# Altium PCB NBP6 Altera Stratix BGA780 Rev1.00.PcbDoc (part 2 of 3)
Units mm, origin at the board's own origin, x right, y up, seen from the top; angles counter-clockwise.
Board outline 69 x 80.99 mm, 6 copper layers (Top Layer, Upper, lower, VCC_PLANE, GND_PLANE, Bottom Layer); 92 components, 279 nets, 1271 pads, 560 vias.
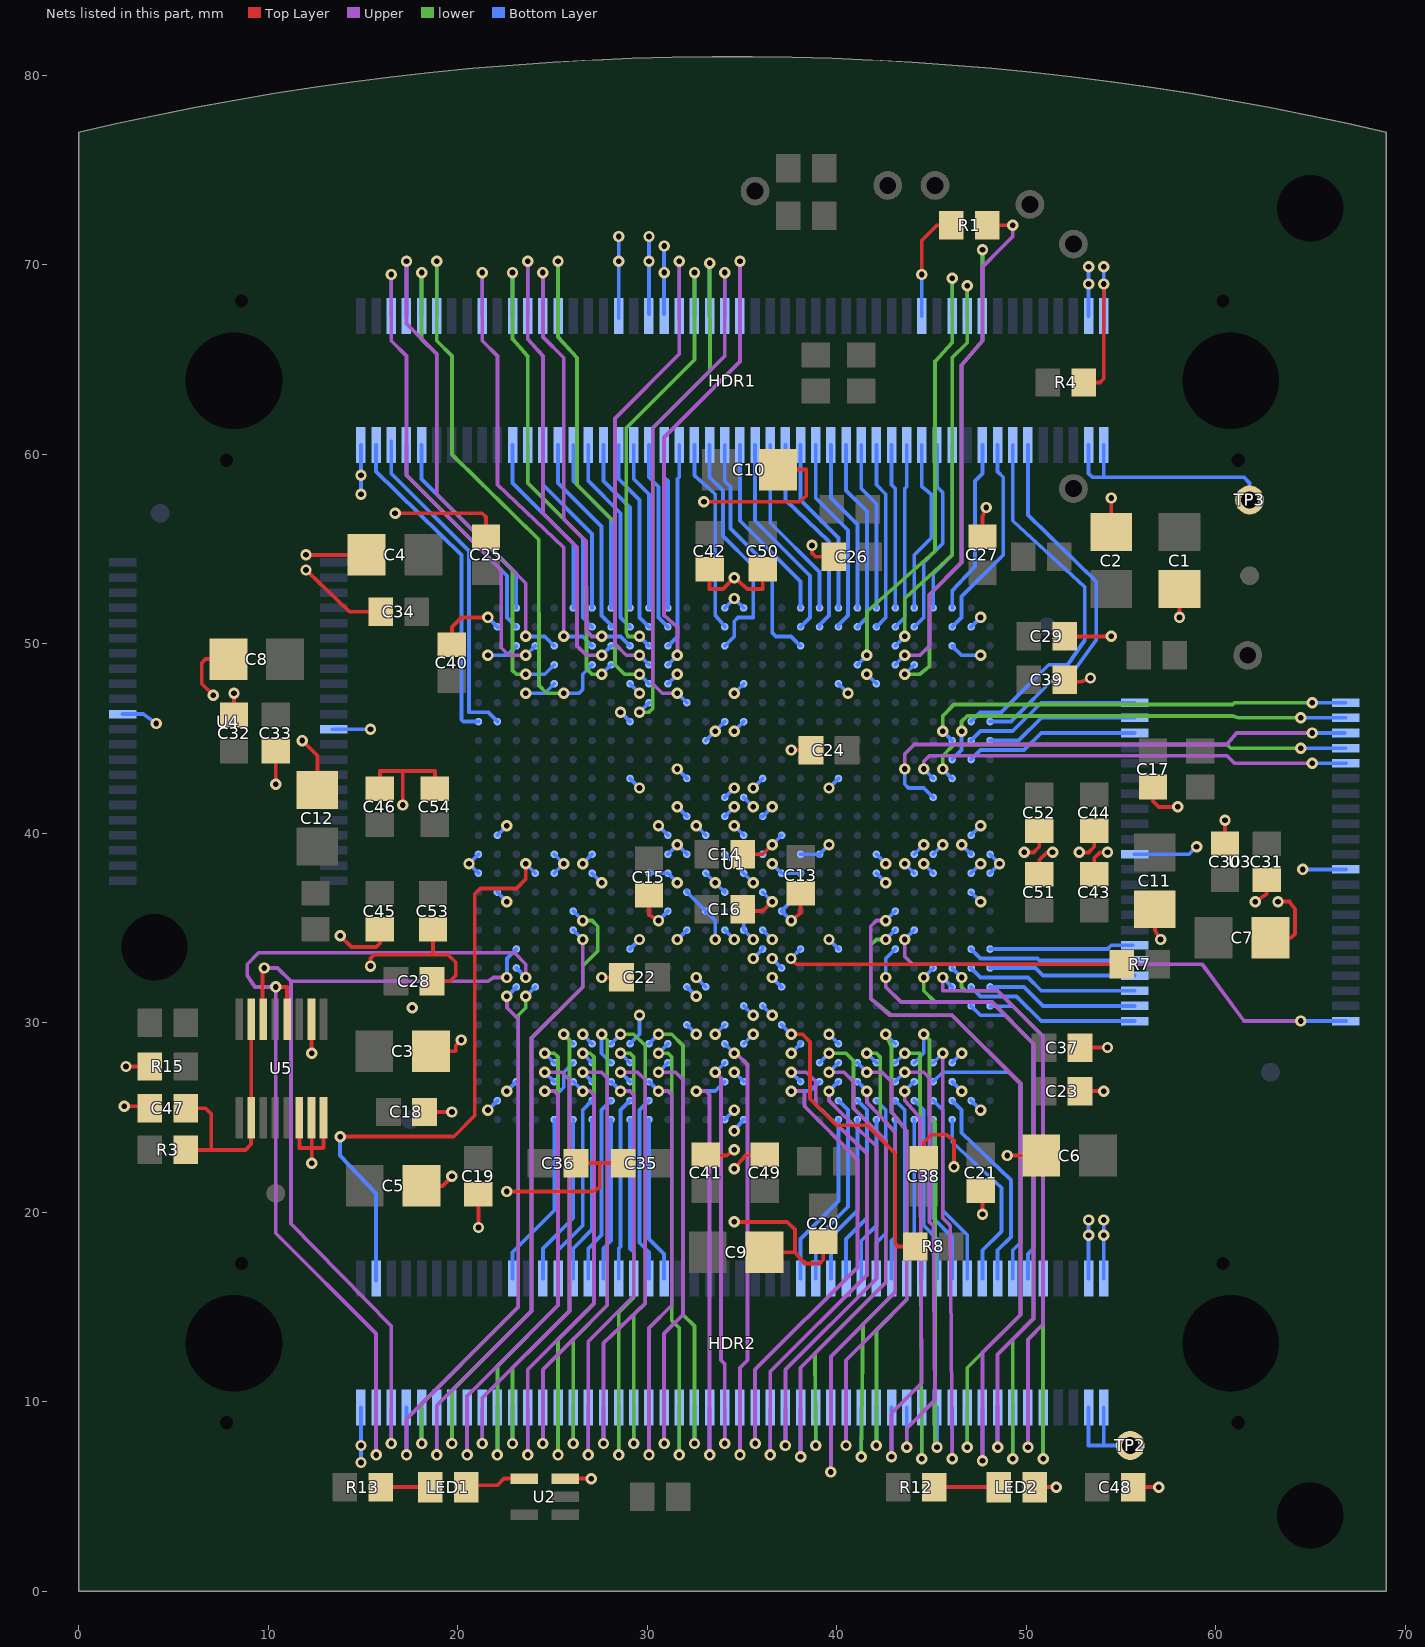
[diagram p6: the nets of this part, all layers, seen from the top]

## Via types
v1: diameter 0.6, hole 0.3, Top Layer to Bottom Layer, 560 vias

## Nets (pads, with @x,y where several pads share a name; then routed paths per layer and width w, separated by ;. In a path a pad name is that pad's centre, name@x,y a point inside that pad or via, vN(x,y) a via of type N, cw(c..) or ccw(c..) an arc to the next point about the centre after c; other vN are vias at no path point) (continued)
GND: C1.2 C2.2 C3.2 C4.2 C5.2 C6.2 C7.2 C8.2 C9.2 C10.2 C11.2 C12.2 C13.2 C14.2 C15.2 C16.2 C17.2 C18.2 C19.2 C20.2 C21.2 C22.2 C23.2 C24.2 C25.2 C26.2 C27.2 C28.2 C29.2 C30.2 C31.2 C32.2 C33.2 C34.2 C35.2 C36.2 C37.2 C38.2 C39.2 C40.2 C41.2 C42.2 C43.2 C44.2 C45.2 C46.2 C47.2 C48.2 C49.2 C50.2 C51.2 C52.2 C53.2 C54.2 HDR1.1 HDR1.36 HDR1.40 HDR1.42 HDR1.98 HDR1.100 HDR2.1 HDR2.98 HDR2.100 LED2.2 R4.2 R15.1 U1.A14 U1.A15 U1.AA12 U1.AA16 U1.AA17 U1.AB13 U1.AB14 U1.AC15 U1.AC17 U1.AD9 U1.AD11 U1.AD14 U1.AD20 U1.AD22 U1.AE3 U1.AF3 U1.AF14 U1.AF26 U1.AG2 U1.AG27 U1.AH14 U1.AH15 U1.B2 U1.B27 U1.C3 U1.C26 U1.E7 U1.E9 U1.E14 U1.E18 U1.E20 U1.E24 U1.G14 U1.G15 U1.G20 U1.H16 U1.K9 U1.K13 U1.K17 U1.K20 U1.L14 U1.L15 U1.M13 U1.M15 U1.M17 U1.N2 U1.N12 U1.N14 U1.N16 U1.N18 U1.N27 U1.P1 U1.P2 U1.P4 U1.P5 U1.P7 U1.P10 U1.P11 U1.P13 U1.P15 U1.P17 U1.P18 U1.P22 U1.P24 U1.P28 U1.R1 U1.R2 U1.R4 U1.R5 U1.R7 U1.R11 U1.R12 U1.R14 U1.R16 U1.R18 U1.R19 U1.R22 U1.R24 U1.R28 U1.T2 U1.T11 U1.T13 U1.T15 U1.T17 U1.T27 U1.U12 U1.U14 U1.U16 U1.U18 U1.V13 U1.V14 U1.V15 U1.V17 U1.W9 U1.W13 U1.W20 U1.Y12 U2.3 U3.12 U3.34 U4.12 U4.34 U5.6 U5.7 U5.8 U5.10 | length 273.2
  Top Layer w0.2: v1(2.4,25.6) C47.2@3.7,25.6 ; v1(2.5,27.7) R15.1@3.75,27.7 ; v1(7.1,47.3) 6.5,47.9 6.5,49 6.7,49.2 C8.2@7.9,49.2 ; C32.2@8.2,46.25 8.2,47.1 v1(8.2,47.4) ; v1@10.4,42.8 C33.2@10.4,44.4 ; U5.6@11.652,25 11.652,23.4 12.9,23.4 12.922,23.422 U5.8@12.922,25 ; v1(11.8,44.9) 12.6,44.1 C12.2@12.6,42.4 ; v1(12,54.7) C4.2@15.2,54.7 ; v1@12.2,53.9 v1(12,53.9) 14.3,51.7 C34.2@15.95,51.7 ; v1(12.3,22.6) U5.7@12.3,25 ; v1(12.3,28.4) 12.287,28.413 U5.10@12.287,30.2 U5.10@12.3,30.213 ; v1(13.8,34.6) 14.4,34 15.7,34 15.9,34.2 C45.2@15.9,35 ; v1@15.4,32.9 15.4,33.4 15.6,33.6 19.5,33.6 19.9,33.2 19.9,32.5 19.6,32.2 C28.2@18.65,32.2 ; C34.2@15.4,51.1 C34.2@16.35,51.1 ; C46.2@15.9,42.35 15.9,43.3 18.8,43.3 C54.2@18.8,42.35 ; v1(16.7,56.9) 21.3,56.9 21.5,56.7 ; v1(17.1,41.5) 17.1,43.3 ; C5.2@18.1,21.4 19.2,21.4 v1(19.7,21.9) ; C18.2@18.2,25.3 v1(19.7,25.3) ; C3.2@18.6,28.5 19.9,28.5 19.9,28.8 v1(20.2,29.1) ; 18.7,33.6 C53.2@18.7,34.95 C53.2@18.7,34.9 ; C40.2@19.7,49.95 19.7,50.9 20.2,51.4 v1(21.6,51.4) ; v1(21.1,19.2) 21.1,20.9 C19.2@21.1,20.95 ; C25.2@21.5,55.85 21.5,56.7 ; 21.5,56.5 21.5,56.7 ; v1(22.6,21.1) 27.1,21.1 27.5,21.3 27.5,22.6 ; U2.3@25.675,5.95 v1(27.05,5.95) ; C36.2@26.25,22.6 27.5,22.6 ; 27.1,22.6 27.5,22.6 ; v1(27.6,32.4) C22.2@28.65,32.4 ; C35.2@28.75,22.6 27.5,22.6 ; C15.2@30.1,36.75 30.1,35.7 v1(30.6,35.4) ; v1(33,57.5) 38,57.5 38.4,57.8 38.4,59.2 C10.2@36.9,59.2 ; C41.2@33.1,23 34.2,23 v1(34.6,23.3) v1@34.6,23.4 ; C42.2@33.3,53.95 33.3,52.9 34,52.9 v1(34.6,53.5) ; v1@34.6,19.6 v1(34.6,19.5) 37.4,19.5 37.8,19.1 37.8,17.9 ; v1(34.6,22.3) 35.2,23 C49.2@36.2,23 ; v1@34.7,53.5 v1(34.6,53.5) ; C16.2@35.05,35.9 36.1,35.9 v1(36.6,36.4) ; C14.2@35.05,38.9 36.1,38.9 v1(36.6,39.4) ; C50.2@36.1,53.95 36.1,52.9 35.3,52.9 v1(34.6,53.5) ; C9.2@36.2,17.9 37.8,17.9 ; v1(37.6,35.4) 38.1,35.8 C13.2@38.1,36.85 ; v1(37.6,44.4) C24.2@38.7,44.4 ; v1(38.7,55.2) 38.7,54.8 38.9,54.6 C26.2@39.85,54.6 ; C20.2@39.3,18.45 39.3,17.5 39.1,17.3 38.3,17.3 37.8,17.9 ; C38.2@44.6,22.85 44.6,23.7 45,24.1 45.8,24.1 46.2,23.8 v1(46.2,22.4) ; v1(47.7,19.9) C21.2@47.7,21 ; C27.2@47.7,55.6 47.7,56.7 v1(47.9,57.2) ; v1(49,23) C6.2@50.7,23 ; v1(49.9,39) 50.4,39 50.7,39.3 C52.2@50.7,40.15 ; LED2.2@50.45,5.5 v1(51.6,5.5) ; C51.2@50.7,37.85 50.7,38.6 51.1,39 v1(51.4,39) ; C39.2@52,48 52.9,48 v1(53.4,48.2) ; C29.2@52.05,50.4 v1@54.2,50.4 ; C37.2@52.4,28.7 v1(54.3,28.7) ; v1(52.8,39) 53.3,39 53.6,39.3 C44.2@53.6,40.2 ; C23.2@52.85,26.4 v1(54.1,26.4) ; R4.2@53.05,63.8 53.9,63.8 54.1,64 v1(54.1,69) ; C43.2@53.6,37.85 53.6,38.7 53.9,39 v1(54.3,39) ; C2.2@54.5,55.9 v1(54.5,57.7) ; C48.2@55.6,5.5 v1(57,5.5) ; C17.2@56.7,42.4 56.7,41.7 57,41.4 v1(58,41.4) ; C11.2@56.8,36 56.8,34.9 v1(57.1,34.4) ; v1(58.1,51.4) C1.2@58.1,52.9 ; C30.2@60.5,39.4 v1(60.5,40.7) ; v1(62.1,36.4) 62.7,36.8 C31.2@62.7,37.55 ; C7.2@62.9,34.5 64,34.5 64.2,34.7 64.2,36 63.9,36.4 v1(63.3,36.4)
  Upper w0.2: v1(27.05,5.95) v1@27.1,6
  Bottom Layer w0.2: U4.34@2.3,46.3 3.4,46.3 v1(4.1,45.8) ; U4.12@13.4,45.5 v1(15.4,45.5) ; v1(14.9,6.8) v1(14.9,7.7) HDR2.1@14.9,9.7 ; v1(14.9,57.9) HDR1.1@14.9,60.5 ; U1.R28@21.1,37.9 v1(20.6,38.4) U1.P28@21.1,38.9 ; v1(21.6,25.4) U1.AG27@22.1,25.9 ; v1(21.6,49.4) 22.6,49.4 U1.C26@23.1,49.9 ; v1(21.6,51.4) U1.B27@22.1,50.9 ; U1.T27@22.1,36.9 v1(22.6,36.4) ; U1.N27@22.1,39.9 v1(22.6,40.4) ; v1(22.6,26.4) U1.AF26@23.1,26.9 ; v1(23.6,47.4) 24.6,47.4 U1.E24@25.1,47.9 ; U1.R24@25.1,37.9 v1(25.6,38.4) U1.P24@25.1,38.9 ; v1(26.6,29.4) U1.AD22@27.1,28.9 ; v1(26.6,38.4) U1.P22@27.1,38.9 ; U1.R22@27.1,37.9 v1(27.6,37.4) ; HDR1.36@28.5,67.2 v1(28.5,71.5) ; v1(28.6,46.4) U1.G20@29.1,45.9 ; U1.AD20@29.1,28.9 29.6,29.4 v1(29.6,30.4) ; U1.W20@29.1,33.9 v1(29.6,34.4) ; U1.K20@29.1,42.9 v1(29.6,42.4) ; U1.E20@29.1,47.9 v1(29.6,47.4) ; U1.R19@30.1,37.9 U1.R18@31.1,37.9 v1(31.6,37.4) ; HDR1.40@30.1,67.4 v1(30.1,71.5) ; v1(30.6,35.4) U1.U18@31.1,35.9 ; v1(30.6,40.4) U1.N18@31.1,39.9 ; HDR1.42@30.9,67.4 v1(30.9,71) ; U1.P18@31.1,38.9 v1(31.6,39.4) U1.P17@32.1,38.9 ; U1.E18@31.1,47.9 v1(31.6,48.4) ; v1(31.6,34.4) U1.V17@32.1,34.9 ; v1(31.6,41.4) U1.M17@32.1,40.9 ; v1(31.6,43.4) U1.K17@32.1,42.9 ; U1.AC17@32.1,29.9 v1(32.6,29.4) ; U1.AA17@32.1,31.9 v1(32.6,31.4) ; U1.T17@32.1,37 U1.T17@32.1,36.9 U1.U16@33.1,35.9 ; v1(32.6,32.4) U1.AA16@33.1,31.9 ; v1(32.6,40.4) U1.N16@33.1,39.9 ; U1.U16@33.1,35.8 U1.U16@33.1,35.9 ; U1.R16@33.1,37.9 v1(33.6,37.4) U1.T15@34.1,36.9 U1.T15@34.1,37 ; U1.H16@33.1,44.9 v1(33.6,45.4) U1.G15@34.1,45.9 ; v1(33.6,29.4) U1.AC15@34.1,29.9 ; v1(33.6,34.4) 33.6,35.3 33.6,35.4 U1.U16@33.1,35.9 ; U1.AH15@34.1,24.9 v1(34.6,25.4) ; U1.V15@34.1,34.9 v1(34.6,34.4) ; U1.P15@34.1,38.9 U1.R14@35.1,37.9 v1@35.5,37.5 ; U1.M15@34.1,40.9 v1(34.6,41.4) ; U1.L15@34.1,41.9 v1(34.6,42.4) ; U1.A15@34.1,51.9 v1(34.6,52.4) U1.A14@35.1,51.9 ; v1(34.6,24.3) U1.AH14@35.1,24.9 ; v1(34.6,27.4) U1.AF14@35.1,26.9 ; v1(34.6,40.4) U1.N14@35.1,39.9 ; v1(34.6,45.4) U1.G14@35.1,45.9 ; v1(34.6,47.4) U1.E14@35.1,47.9 ; U1.AD14@35.1,28.9 v1(35.6,29.4) ; U1.AB14@35.1,30.9 v1(35.6,30.4) ; U1.U14@35.1,35.9 U1.V14@35.1,34.9 v1(35.6,34.4) ; U1.L14@35.1,41.9 v1(35.6,41.4) ; v1(35.6,33.4) U1.W13@36.1,33.9 ; v1(35.6,42.4) U1.K13@36.1,42.9 ; U1.M13@36,40.9 U1.M13@36.1,40.9 v1(36.6,41.4) ; U1.AB13@36.1,30.9 v1(36.6,30.4) ; U1.V13@36.1,34.9 v1(36.6,34.4) ; U1.T13@36.1,36.9 v1(36.6,36.4) ; U1.P13@36.1,38.9 v1(36.6,39.4) ; v1(36.6,32.4) U1.AA12@37.1,31.9 ; v1(36.6,33.4) U1.Y12@37.1,32.9 ; v1(36.6,38.4) U1.R12@37.1,37.9 ; v1@36.6,39.5 v1(36.6,39.4) ; U1.N12@37,39.8 v1(36.6,39.4) ; U1.R12@37.2,37.9 U1.R12@37.1,37.9 ; v1(37.6,28.4) U1.AD11@38.1,28.9 ; v1(37.6,35.4) U1.U12@37.1,35.9 U1.T11@38.1,36.9 ; U1.AD11@38,28.9 U1.AD11@38.1,29 ; U1.R11@38,37.9 U1.R11@38.1,37.9 ; U1.P11@38.1,38.9 U1.P10@39.1,38.9 ; U1.R11@38.2,37.9 U1.R11@38.1,37.9 ; U1.P10@39.1,38.8 U1.P10@39.1,38.9 ; v1(39.6,29.4) U1.AD9@40.1,28.9 ; v1(39.6,34.4) U1.W9@40.1,33.9 ; v1(39.6,39.4) U1.P10@39.1,38.9 ; v1(39.6,42.4) U1.K9@40.1,42.9 ; U1.E9@40.1,47.9 v1(40.6,47.4) ; v1(41.6,48.4) U1.E7@42.1,47.9 ; U1.R7@42.1,37.9 v1(42.6,37.4) ; U1.P7@42.1,38.9 v1(42.6,38.4) ; v1(43.6,38.4) U1.R5@44.1,37.9 ; U1.P5@44.1,38.9 v1(44.6,39.4) ; v1(44.6,38.4) U1.R4@45.1,37.9 ; U1.P4@45.1,38.9 v1(45.6,39.4) ; U1.AF3@46.1,26.9 v1(46.6,26.4) ; U1.AE3@46.1,27.9 v1(46.6,28.4) ; U1.C3@46.2,49.9 U1.C3@46.1,49.9 46.6,49.4 v1(47.6,49.4) ; v1(46.6,39.4) U1.P2@47.1,38.9 U1.P2@47.1,39 ; U1.AG2@47.1,25.9 v1(47.6,25.4) ; U1.T2@47.1,36.9 v1(47.6,36.4) ; U1.R2@47.1,37.9 v1(47.6,38.4) ; U1.N2@47.1,39.9 v1(47.6,40.4) ; U1.B2@47.1,50.9 v1(47.6,51.4) ; U1.R1@48.1,37.9 v1(48.6,38.4) U1.P1@48.1,38.9 ; HDR2.98@53.3,16.5 v1(53.3,19.6) ; HDR1.98@53.3,67.3 v1(53.3,69.9) ; HDR2.100@54.1,16.5 v1(54.1,19.6) ; HDR1.100@54.1,67.4 v1(54.1,69.9) ; U3.34@55.725,38.9 58.6,38.9 v1(59,39.3) ; v1(64.6,38.1) U3.12@66.9,38.1 ; U1.W13@36.1,33.9 36.1,34 U1.W13@36.1,33.9 ; U1.R12@37.1,37.9 U1.R11@38.1,37.9 ; U1.N12@37,39.9 U1.N12@37.1,39.9 U1.N12@37,39.9
  other v1: 53.3,18.8 54.1,18.8 17.6,30.8 15.4,33 35.6,37.4 10.4,42.6 54.5,50.4 14.9,58.9 53.3,69 30.9,69.6 28.5,70.2 30.1,70.2
GREEN0: HDR1.10 U1.D24 | length 27.7
  lower w0.2: v1(18.1,69.6) 18.1,66.1 18.9,65.3 18.9,57.9 22.9,53.9 22.9,48.6 23.1,48.4 v1(23.6,48.4)
  Bottom Layer w0.2: HDR1.10@18.1,67.4 v1(18.1,69.6) ; v1(23.6,48.4) 24.6,48.4 U1.D24@25.1,48.9
GREEN1: HDR1.12 U1.D22 | length 31.6
  lower w0.2: v1(18.9,70.2) 18.9,66 19.7,65.2 19.7,60 24.283,55.517 24.3,47.8 24.7,47.4 v1(25.6,47.4)
  Bottom Layer w0.2: HDR1.12@18.9,67.3 v1(18.9,70.2) ; v1(25.6,47.4) 26.4,47.4 26.6,47.6 26.6,48.4 U1.D22@27.1,48.9
HDRIVE: HDR1.18 U1.C22 | length 25
  Upper w0.2: v1(21.3,69.6) 21.3,66 22.1,65.2 22.1,58.4 25.6,55.1 v1(25.6,50.4)
  Bottom Layer w0.2: HDR1.18@21.3,67.3 v1(21.3,69.6) ; v1(25.6,50.4) 26.6,50.4 U1.C22@27.1,49.9
INIT_DONE: R7.2 U1.W11 | length 18.3
  Top Layer w0.2: v1(37.592,33.401) 37.893,33.1 R7.2@55.05,33.1
  Bottom Layer w0.2: v1(37.592,33.401) v1@37.633,33.441 ; v1@37.637,33.437 U1.W11@38.1,33.9
IO0: HDR2.7 U1.AA26 | length 30.1
  Upper w0.2: v1(17.3,7.2) 17.3,9.1 23.2,15 23.2,30.2 22.6,30.8 v1(22.6,31.4)
  Bottom Layer w0.2: v1(17.3,7.2) HDR2.7@17.3,9.7 ; v1(22.6,31.4) U1.AA26@23.1,31.9
IO1: HDR2.9 U1.AA25 | length 28.4
  lower w0.2: v1(18.1,7.8) 18.1,9.9 23.2,15 23.2,15.3 23.2,30.4 23.6,30.8 v1(23.6,31.4)
  Bottom Layer w0.2: v1(18.1,7.8) HDR2.9@18.1,9.6 ; v1(23.6,31.4) U1.AA25@24.1,31.9
IO2: HDR2.11 U1.V23 | length 33.6
  Upper w0.2: v1(18.9,7.2) 18.9,9.8 23.9,14.8 23.9,29.2 26.6,31.9 v1(26.6,34.4)
  Bottom Layer w0.2: v1(18.9,7.2) HDR2.11@18.9,9.7 ; U1.V23@26.1,34.9 v1(26.6,34.4)
IO3: HDR2.13 U1.U23 | length 34
  lower w0.2: v1(19.7,7.8) 19.7,10.6 23.9,14.8 23.9,29.2 26.6,31.9 26.6,33 27.4,33.8 27.4,35.1 27.1,35.4 v1(26.6,35.4)
  Bottom Layer w0.2: v1(19.7,7.8) HDR2.13@19.7,9.7 ; U1.U23@26.1,35.9 v1(26.6,35.4)
IO4: HDR2.15 U1.AE23 | length 26.9
  Upper w0.2: v1(20.5,7.2) 20.5,10.3 25.3,15.1 25.3,26.2 25.1,26.4 v1(24.6,26.4)
  Bottom Layer w0.2: v1(20.5,7.2) HDR2.15@20.5,9.7 ; v1(24.6,26.4) 25.4,26.4 25.6,26.6 25.6,27.4 U1.AE23@26.1,27.9
IO5: HDR2.17 U1.AF24 | length 25.2
  Upper w0.2: v1(21.3,7.8) 21.3,10.2 25.9,14.8 25.9,27 25.5,27.4 v1(24.6,27.4)
  Bottom Layer w0.2: v1(21.3,7.8) HDR2.17@21.3,9.7 ; v1(24.6,27.4) U1.AF24@25.1,26.9
IO6: HDR2.19 U1.AE24 | length 26.3
  lower w0.2: v1(22.1,7.2) 22.1,11.9 25.3,15.1 25.3,28.2 25.1,28.4 v1(24.6,28.4)
  Bottom Layer w0.2: v1(22.1,7.2) HDR2.19@22.1,9.7 ; v1(24.6,28.4) U1.AE24@25.1,27.9
IO7: HDR2.21 U1.AD23 | length 25.6
  lower w0.2: v1(22.9,7.8) 22.9,11.8 25.9,14.8 25.9,29.1 v1(25.6,29.4)
  Bottom Layer w0.2: v1(22.9,7.8) HDR2.21@22.9,9.7 ; v1(25.6,29.4) U1.AD23@26.1,28.9
IO8: HDR2.23 U1.AF23 | length 24.3
  Upper w0.2: v1(23.7,7.2) 23.7,11.7 27.2,15.2 27.2,26.2 27,26.4 v1(26.6,26.4)
  Bottom Layer w0.2: v1(23.7,7.2) HDR2.23@23.7,9.7 ; U1.AF23@26.1,26.9 v1(26.6,26.4)
IO9: HDR2.25 U1.AF22 | length 24.7
  Upper w0.2: v1(24.5,7.8) 24.5,11.7 27.9,15.1 27.9,27.1 27.6,27.4 v1(26.6,27.4)
  Bottom Layer w0.2: v1(24.5,7.8) HDR2.25@24.5,9.7 ; v1(26.6,27.4) U1.AF22@27.1,26.9
IO10: HDR2.27 U1.AE22 | length 25.8
  lower w0.2: v1(25.3,7.2) 25.3,13.3 27.2,15.2 27.2,28.2 27,28.4 v1(26.6,28.4)
  Bottom Layer w0.2: v1(25.3,7.2) HDR2.27@25.3,9.8 ; v1(26.6,28.4) U1.AE22@27.1,27.9
IO11: HDR2.29 U1.AE21 | length 26.1
  lower w0.2: v1(26.1,7.8) 26.1,13.3 27.9,15.1 27.9,29.1 v1(27.6,29.4)
  Bottom Layer w0.2: v1(26.1,7.8) HDR2.29@26.1,9.7 ; v1(27.6,29.4) 27.6,28.4 U1.AE21@28.1,27.9
IO12: HDR2.31 U1.AF21 | length 24.1
  Upper w0.2: v1(26.9,7.2) 26.9,13.2 29.3,15.6 29.3,26.2 29.1,26.4 v1(28.6,26.4)
  Bottom Layer w0.2: v1(26.9,7.2) HDR2.31@26.9,9.8 ; U1.AF21@28.1,26.9 v1(28.6,26.4)
IO13: HDR2.33 U1.AF20 | length 24.2
  Upper w0.2: v1(27.7,7.8) 27.7,13.1 29.9,15.2 29.9,27 29.5,27.4 v1(28.6,27.4)
  Bottom Layer w0.2: v1(27.7,7.8) HDR2.33@27.7,9.7 ; v1(28.6,27.4) U1.AF20@29.1,26.9
IO14: HDR2.35 U1.AE20 | length 25.3
  lower w0.2: v1(28.5,7.2) 28.5,14.7 29.3,15.5 29.3,28.2 29.1,28.4 v1(28.6,28.4)
  Bottom Layer w0.2: v1(28.5,7.2) HDR2.35@28.5,9.7 ; v1(28.6,28.4) U1.AE20@29.1,27.9
IO15: HDR2.37 U1.AD21 | length 25.5
  lower w0.2: v1(28.6,29.4) 29.3,29.4 29.9,28.8 29.9,15.2 29.3,14.6 v1(29.3,7.8)
  Bottom Layer w0.2: U1.AD21@28.1,28.9 v1(28.6,29.4) ; v1(29.3,7.8) HDR2.37@29.3,9.8
IO16: HDR2.39 U1.AF19 | length 23.5
  Upper w0.2: v1(30.1,7.2) 30.1,13.9 31.3,15.1 31.3,26.2 31.1,26.4 v1(30.6,26.4)
  Bottom Layer w0.2: v1(30.1,7.2) HDR2.39@30.1,9.7 ; U1.AF19@30.1,26.9 v1(30.6,26.4)
IO17: HDR2.41 U1.AE18 | length 23.7
  Upper w0.2: v1(30.6,27.4) 31.5,27.4 31.9,27 31.9,14.6 30.9,13.6 v1(30.9,7.8)
  Bottom Layer w0.2: v1(30.6,27.4) U1.AE18@31.1,27.9 ; v1(30.9,7.8) HDR2.41@30.9,9.7
IO18: HDR2.43 U1.AD18 | length 25.2
  lower w0.2: v1(30.6,28.4) 31.1,28.4 31.3,28.2 31.3,14.3 31.7,13.9 v1(31.7,7.2)
  Bottom Layer w0.2: v1(30.6,28.4) U1.AD18@31.1,28.9 ; v1(31.7,7.2) HDR2.43@31.7,9.7
IO19: HDR2.45 U1.AD19 | length 25.4
  lower w0.2: v1(30.6,29.4) 31.3,29.4 31.9,28.8 31.9,14.6 32.5,14 v1(32.5,7.8)
  Bottom Layer w0.2: U1.AD19@30.1,28.9 v1(30.6,29.4) ; v1(32.5,7.8) HDR2.45@32.5,9.7
IO20: HDR2.47 U1.AF15 | length 24
  Upper w0.2: v1(32.6,26.4) 33.1,26.4 33.3,26.2 v1(33.3,7.2)
  Bottom Layer w0.2: v1(32.6,26.4) 33.6,26.4 U1.AF15@34.1,26.9 ; v1(33.3,7.2) HDR2.47@33.3,9.7
IO21: HDR2.49 U1.AE15 | length 22.4
  Upper w0.2: v1(33.6,27.4) 33.9,27.1 33.9,12.2 34.1,12 v1(34.1,7.8)
  Bottom Layer w0.2: v1(33.6,27.4) U1.AE15@34.1,27.9 ; v1(34.1,7.8) HDR2.49@34.1,9.7
IO22: HDR2.51 U1.AD15 | length 24.9
  Upper w0.2: v1(34.6,28.4) 34.7,28.4 35.3,27.8 35.3,12.2 34.9,11.8 v1(34.9,7.2)
  Bottom Layer w0.2: U1.AD15@34.1,28.9 v1(34.6,28.4) ; v1(34.9,7.2) HDR2.51@34.9,9.7
IO23: HDR2.53 U1.AF10 | length 26.3
  Upper w0.2: v1(35.7,7.8) 35.7,11.7 41.1,17.1 41.1,20.1 41.1,22.8 38.3,25.6 38.3,26.3 38.2,26.4 v1(37.6,26.4)
  Bottom Layer w0.2: v1@35.6,7.8 35.7,7.9 HDR2.53@35.7,9.7 ; v1(37.6,26.4) 38.6,26.4 U1.AF10@39.1,26.9
IO24: HDR2.55 U1.AF11 | length 31.1
  Upper w0.2: v1(36.5,7.2) 36.5,11.6 41.6,16.7 41.6,23.1 ; v1(37.6,27.4) 38.4,27.4 38.9,26.9 38.9,25.7 41.6,23.1 ; 41.6,19.7 41.6,23.1
  Bottom Layer w0.2: v1(36.5,7.2) HDR2.55@36.5,9.7 ; v1(37.6,27.4) U1.AF11@38.1,26.9
IO25: HDR2.57 U1.AF9 | length 24.5
  Upper w0.2: v1(37.3,7.7) 37.3,11.7 42.1,16.5 42.1,23.5 40.3,25.2 39.6,25.9 v1(39.6,26.4)
  Bottom Layer w0.2: v1(37.3,7.7) HDR2.57@37.3,9.7 ; v1(39.6,26.4) U1.AF9@40.1,26.9
IO26: HDR2.59 U1.AE9 | length 27.2
  Upper w0.2: v1(38.1,7.1) 38.1,11.8 42.6,16.3 42.6,18.9 42.6,23.8 40.9,25.5 40.9,26.9 40.4,27.4 v1(39.6,27.4)
  Bottom Layer w0.2: v1(38.1,7.1) HDR2.59@38.1,9.7 ; v1(39.6,27.4) U1.AE9@40.1,27.9
IO27: HDR2.61 U1.AE10 | length 31.6
  lower w0.2: v1(38.9,7.7) 38.869,12.569 42.6,16.3 42.6,23.8 ; v1(39.6,28.4) 40.5,28.4 40.9,28 40.9,25.5 42.6,23.8 ; 42.6,18.9 42.6,23.8
  Bottom Layer w0.2: v1(38.9,7.7) HDR2.61@38.9,9.7 ; U1.AE10@39.1,27.9 v1(39.6,28.4)
IO28: HDR2.63 U1.AF8 | length 30
  Upper w0.2: v1(39.7,6.3) 39.7,12.4 43.1,15.8 ; v1(41.6,26.4) 41.6,25.8 42.3,25.1 43.1,24.2 43.1,15.8 ; 43.1,18.7 43.1,15.8
  Bottom Layer w0.2: 39.7,7.2 v1(39.7,6.3) HDR2.63@39.7,9.7 ; U1.AF8@41.1,26.9 v1(41.6,26.4)
IO29: HDR2.65 U1.AE8 | length 25
  Upper w0.2: v1@40.5,7.7 40.5,12.2 43.7,15.4 43.7,24.3 42.9,25.3 42.9,26.9 42.4,27.4 v1(41.6,27.4)
  Bottom Layer w0.2: v1(40.5,7.7) HDR2.65@40.5,9.7 ; U1.AE8@41.1,27.9 v1(41.6,27.4)
IO30: HDR2.67 U1.AE7 | length 26.3
  lower w0.2: v1(41.3,7.1) 41.4,14.1 43.1,15.8 43.1,18.7 43.1,24.2 42.3,25.1 42.3,28.2 42.1,28.4 v1(41.6,28.4)
  Bottom Layer w0.2: v1@41.3,7 v1(41.3,7.1) HDR2.67@41.3,9.7 ; v1(41.6,28.4) U1.AE7@42.1,27.9
IO31: HDR2.69 U1.AD6 | length 25.4
  lower w0.2: v1(42.1,7.7) 42.1,13.8 43.7,15.4 43.7,24.3 42.9,25.3 42.9,28.7 v1(42.6,29.4)
  Bottom Layer w0.2: v1(42.1,7.7) HDR2.69@42.1,9.7 ; v1(42.6,29.4) U1.AD6@43.1,28.9
IO32: HDR2.71 U1.AF5 | length 23.6
  Upper w0.2: v1(42.9,7.1) 42.9,9.4 44.5,11 44.4,25 43.6,25.9 v1(43.6,26.4)
  Bottom Layer w0.2: v1(42.9,7.1) HDR2.71@42.9,9.7 ; v1(43.6,26.4) U1.AF5@44.1,26.9
IO33: HDR2.73 U1.AF6 | length 29.7
  Upper w0.2: v1(43.6,27.4) 44.6,27.4 44.9,27.1 44.9,25.1 44.9,24.8 ; v1(43.7,7.6) 43.7,8.6 45.2,10.1 45.1,19.3 44.9,19.5 ; 44.9,19.5 44.9,24.8 ; 44.9,19.5 44.9,24.8
  Bottom Layer w0.2: U1.AF6@43.1,26.9 v1(43.6,27.4) ; v1(43.7,7.6) HDR2.73@43.7,9.7
IO34: HDR2.75 U1.AE6 | length 25.6
  lower w0.2: v1(43.6,28.4) 44.4,28.4 v1(44.5,7)
  Bottom Layer w0.2: U1.AE6@43.1,27.9 v1(43.6,28.4) ; v1(44.5,7) HDR2.75@44.5,9.7
IO35: HDR2.77 U1.AE5 | length 25.8
  lower w0.2: v1(44.6,29.4) 44.9,29.1 44.9,25.1 45.2,24.7 v1@45.2,7.6
  Bottom Layer w0.2: U1.AE5@44.1,27.9 44.6,28.4 v1(44.6,29.4) ; v1(45.3,7.6) HDR2.77@45.3,9.7
JIOA0: HDR1.3 U1.G28 | length 17.3
  Bottom Layer w0.2: HDR1.3@15.7,60.5 15.7,59.1 20.2,54.7 20.2,52.8 20.2,46 20.3,45.9 U1.G28@21.1,45.9
JIOA1: HDR1.5 U1.G27 | length 18
  Bottom Layer w0.2: HDR1.5@16.5,60.4 HDR1.5@16.5,60.5 16.5,60.7 16.5,59 20.6,54.9 20.6,46.4 21.6,46.4 U1.G27@22.1,45.9
JIOA2: HDR1.7 U1.B26 | length 12
  Bottom Layer w0.2: HDR1.7@17.3,60.5 17.3,59.1 17.3,58.9 22.6,53.6 22.6,52.6 22.6,51.4 U1.B26@23.1,50.9
JIOA3: HDR1.9 U1.A26 | length 11.1
  Bottom Layer w0.2: HDR1.9@18.1,60.5 18.1,59.1 18.1,59.3 18.1,58.7 23.1,53.7 U1.A26@23.1,51.9
JIOB0: HDR1.83 U1.A3 | length 9.2
  Bottom Layer w0.2: U1.A3@46.1,51.9 46.1,52.8 47.3,54.1 47.3,58.3 47.3,58.6 47.7,59 HDR1.83@47.7,60.5
JIOB1: HDR1.85 U1.B3 | length 10.8
  Bottom Layer w0.2: U1.B3@46.1,50.9 46.6,51.4 46.6,52.5 48.8,54.7 48.8,58.8 48.5,59.1 HDR1.85@48.5,60.5
JIOB2: HDR1.87 U1.G2 | length 20
  Bottom Layer w0.2: U1.G2@47.1,45.9 47.6,46.4 48.7,46.4 49.1,46.8 51.2,48.9 52.2,48.9 53.1,50.2 53.1,53 ; HDR1.87@49.3,60.5 49.3,56.5 53.1,53 ; 53.1,52.9 53.1,53
JIOB3: HDR1.89 U1.G1 | length 19.4
  Bottom Layer w0.2: U1.G1@48.1,45.9 49.2,45.9 51.7,48.4 52.4,48.4 53.7,50.2 53.7,53.3 50.1,56.8 HDR1.89@50.1,60.5
KBCLOCK: HDR1.22 U1.D21 | length 26.4
  lower w0.2: v1(22.9,69.6) 22.9,66.1 23.7,65.2 23.7,58.5 26.781,55.419 26.8,48.7 27.1,48.4 v1(27.6,48.4)
  Bottom Layer w0.2: HDR1.22@22.9,67.3 v1(22.9,69.6) ; v1(27.6,48.4) U1.D21@28.1,48.9
KBDATA: HDR1.24 U1.C21 | length 26.5
  Upper w0.2: v1(23.7,70.2) 23.7,66.1 24.5,65.2 24.5,56.9 26.3,55.1 26.3,49.9 26.8,49.4 v1(27.6,49.4)
  Bottom Layer w0.2: HDR1.24@23.7,67.3 v1(23.7,70.2) ; v1(27.6,49.4) U1.C21@28.1,49.9
LCD_BCKL: HDR2.22 U1.AH24 | length 9.3
  Bottom Layer w0.2: HDR2.22@22.9,16.5 22.9,17.9 25.1,20.1 U1.AH24@25.1,24.9
LCD_E: HDR2.26 U1.AH23 | length 9.1
  Bottom Layer w0.2: HDR2.26@24.5,16.5 24.5,18.1 26.1,19.7 U1.AH23@26.1,24.9
LED0: HDR2.60 U1.AH9 | length 9.2
  Bottom Layer w0.2: HDR2.60@38.1,16.5 38.1,18.6 40.1,20.6 U1.AH9@40.1,24.9
LED1: HDR2.62 U1.AG9 | length 10.3
  Bottom Layer w0.2: HDR2.62@38.9,16.5 38.9,18.6 40.6,20.3 40.6,25.4 U1.AG9@40.1,25.9
LED2: HDR2.64 U1.AH8 | length 9
  Bottom Layer w0.2: HDR2.64@39.7,16.5 39.7,18.7 41.1,20.1 U1.AH8@41.1,24.9
LED3: HDR2.66 U1.AG8 | length 10.2
  Bottom Layer w0.2: HDR2.66@40.5,16.6 HDR2.66@40.5,16.5 40.5,18.6 41.6,19.7 41.6,25.4 U1.AG8@41.1,25.9
LED4: HDR2.68 U1.AH7 | length 8.7
  Bottom Layer w0.2: HDR2.68@41.3,16.5 41.3,18.5 42.1,19.3 U1.AH7@42.1,24.9
LED5: HDR2.70 U1.AG7 | length 9.8
  Bottom Layer w0.2: HDR2.70@42.1,16.5 42.1,18.4 42.6,18.9 42.6,25.4 U1.AG7@42.1,25.9
LED6: HDR2.72 U1.AH6 | length 8.5
  Bottom Layer w0.2: HDR2.72@42.9,16.5 42.9,18.5 43.1,18.7 U1.AH6@43.1,24.9
LED7: HDR2.74 U1.AG6 | length 9.7
  Bottom Layer w0.2: U1.AG6@43.1,25.8 U1.AG6@43.1,25.9 43.6,25.4 43.6,18.7 43.7,18.5 HDR2.74@43.7,16.5
MOUSECLOCK: HDR1.26 U1.C20 | length 24.9
  Upper w0.2: v1(24.5,69.6) 24.5,66.2 25.6,65.1 25.6,56.6 26.781,55.419 26.799,50.7 ; 26.8,50.7 27.1,50.4 v1(27.6,50.4)
  Bottom Layer w0.2: HDR1.26@24.5,67.2 v1(24.5,69.6) ; v1(27.6,50.4) 28.6,50.4 U1.C20@29.1,49.9
MOUSEDATA: HDR1.28 U1.E19 | length 27.6
  lower w0.2: v1(25.3,70.2) 25.3,66.2 26.3,65.1 26.3,58.4 28.3,56.4 28.3,48.9 28.8,48.4 v1(29.6,48.4)
  Bottom Layer w0.2: HDR1.28@25.3,67.3 v1(25.3,70.2) ; v1(29.6,48.4) U1.E19@30.1,47.9
NetC47_1: C47.1 R3.2 U5.2 U5.15 | length 13.4
  Top Layer w0.2: R3.2@5.65,23.3 8.8,23.3 9.1,23.6 ; C47.1@5.65,25.5 6.7,25.5 7,25.2 7,23.3 ; 9.103,23.6 9.112,24.612 9.112,24.9 U5.15@9.112,30.1
NetHDR1_97: HDR1.97 HDR1.99 TP3.1 | length 12.8
  Bottom Layer w0.2: HDR1.97@53.3,60.5 53.3,59 53.5,58.8 55.5,58.8 61.5,58.8 61.8,58.5 TP3.1@61.8,57.6 ; 54.1,58.8 HDR1.99@54.1,60.5
NetHDR2_97: HDR2.97 HDR2.99 TP2.1 | length 6.2
  Bottom Layer w0.2: HDR2.97@53.3,9.7 53.3,7.7 54.1,7.7 ; HDR2.99@54.1,9.7 54.1,7.7 ; TP2.1@55.5,7.7 54.1,7.7
NetLED1_1: LED1.1 R13.2 | length 2.6
  Top Layer w0.2: R13.2@15.95,5.5 LED1.1@18.55,5.5
NetLED1_2: LED1.2 U2.4 | length 3.2
  Top Layer w0.2: LED1.2@20.5,5.6 22.1,5.6 22.45,5.95 U2.4@23.525,5.95
NetLED2_1: LED2.1 R12.2 | length 3.4
  Top Layer w0.2: R12.2@45.15,5.5 LED2.1@48.6,5.5
NEXUS_TCK: HDR1.82 U1.C6 | length 22.2
  lower w0.2: v1(43.6,50.4) 43.6,52.4 46.1,54.7 46.1,65.1 46.9,65.9 v1(46.9,68.9)
  Bottom Layer w0.2: U1.C6@43.1,49.9 v1(43.6,50.4) ; HDR1.82@46.9,67.3 v1(46.9,68.9)
NEXUS_TDI: HDR1.84 U1.D5 | length 28.8
  lower w0.2: v1(43.6,48.4) 44.4,48.4 44.9,48.8 44.9,52.6 46.6,54.3 46.6,64.7 47.7,66 v1(47.7,70.8)
  Bottom Layer w0.2: v1(43.6,48.4) U1.D5@44.1,48.9 ; HDR1.84@47.7,67.3 47.7,70.3 v1(47.7,70.8)
NEXUS_TDO: HDR1.76 R1.1 | length 6
  Top Layer w0.2: v1(44.5,69.5) 44.5,71.3 45.3,72.1 R1.1@46.15,72.1
  Bottom Layer w0.2: HDR1.76@44.5,67.3 v1(44.5,69.5)
NEXUS_TDO#: R1.2 U1.D6 | length 27.4
  Top Layer w0.2: R1.2@48.05,72.1 v1(49.3,72.1)
  Upper w0.2: v1(43.6,49.4) 44.4,49.4 44.9,49.9 44.9,52.6 46.6,54.3 46.6,64.7 47.7,66 47.7,69.9 48.6,70.8 49.3,71.5 v1(49.3,72.1)
  Bottom Layer w0.2: U1.D6@43.1,48.9 v1(43.6,49.4)
NEXUS_TMS: HDR1.80 U1.D8 | length 24.5
  lower w0.2: v1(41.6,49.4) 41.6,51.7 45.2,54.9 45.2,64.9 46.1,65.9 v1(46.1,69.3)
  Bottom Layer w0.2: U1.D8@41.1,48.9 v1(41.6,49.4) ; HDR1.80@46.1,67.4 v1(46.1,69.3)
PORSEL: R8.1 U1.AC12 | length 16.4
  Top Layer w0.2: v1(37.6,29.4) 38.2,29.4 38.6,29 38.6,26 40,24.6 41.6,24.6 43.1,23.1 43.1,18.4 43.2,18.2 R8.1@44.15,18.2
  Bottom Layer w0.2: U1.AC12@37.1,29.9 v1(37.6,29.4)
RAM0_DATA0: HDR2.42 U1.AH19 | length 8.7
  Bottom Layer w0.2: U1.AH19@30.1,24.9 30.1,18.6 30.9,17.8 HDR2.42@30.9,16.5
RAM0_DATA1: HDR2.40 U1.AG19 | length 9.8
  Bottom Layer w0.2: HDR2.40@30.1,16.5 30.1,17.9 29.6,18.4 29.6,25.4 U1.AG19@30.1,25.9
RAM0_DATA2: HDR2.38 U1.AH20 | length 8.5
  Bottom Layer w0.2: U1.AH20@29.1,24.9 29.1,18.1 29.3,17.9 HDR2.38@29.3,16.5
RAM0_DATA3: HDR2.36 U1.AG20 | length 9.6
  Bottom Layer w0.2: HDR2.36@28.5,16.5 28.5,18.1 28.6,18.2 28.6,25.4 U1.AG20@29.1,25.9
RAM0_DATA4: HDR2.34 U1.AH21 | length 8.6
  Bottom Layer w0.2: HDR2.34@27.7,16.5 27.7,18.1 28.1,18.5 U1.AH21@28.1,24.9
RAM0_DATA5: HDR2.32 U1.AG21 | length 9.9
  Bottom Layer w0.2: HDR2.32@26.9,16.5 26.9,18.1 27.6,18.8 27.6,25.4 U1.AG21@28.1,25.9
RAM0_DATA6: HDR2.30 U1.AH22 | length 8.8
  Bottom Layer w0.2: HDR2.30@26.1,16.5 26.1,18.1 27.1,19.1 U1.AH22@27.1,24.9
RAM0_DATA7: HDR2.28 U1.AG22 | length 10.1
  Bottom Layer w0.2: HDR2.28@25.3,16.5 25.3,18 26.6,19.3 26.6,25.4 U1.AG22@27.1,25.9
RAM0_OE: HDR1.41 U1.A18 | length 8.7
  Bottom Layer w0.2: HDR1.41@30.9,60.5 30.9,58.8 31.1,58.6 U1.A18@31.1,51.9
RAM0_WE: HDR1.79 U1.A4 | length 9
  Bottom Layer w0.2: U1.A4@45.1,51.9 45.1,52.6 45.1,53.7 46.1,54.7 HDR1.79@46.1,60.5
RAM1_DATA0: HDR1.45 U1.B15 | length 10.3
  Bottom Layer w0.2: HDR1.45@32.5,60.5 32.5,58.9 33.6,57.9 33.6,51.5 U1.B15@34.1,50.9
RAM1_DATA1: HDR1.49 U1.C11 | length 12.7
  Bottom Layer w0.2: HDR1.49@34.1,60.5 34.1,58.6 34.4,58.3 34.4,56.1 36.6,53.9 36.6,50.6 36.8,50.4 37.6,50.4 U1.C11@38.1,49.9
RAM1_DATA2: HDR1.53 U1.B11 | length 11
  Bottom Layer w0.2: HDR1.53@35.7,60.5 35.7,56.5 38.6,53.6 38.6,51.4 U1.B11@38.1,50.9
RAM1_DATA3: HDR1.57 U1.B10 | length 10.8
  Bottom Layer w0.2: HDR1.57@37.3,60.5 37.3,57.6 39.6,55.4 39.6,51.5 39.1,51 U1.B10@39.1,50.9
RAM1_DATA4: HDR1.55 U1.A10 | length 9.6
  Bottom Layer w0.2: 36.5,56.4 39.1,53.8 U1.A10@39.1,51.9 ; 36.5,56.5 HDR1.55@36.5,60.5
RAM1_DATA5: HDR1.51 U1.A11 | length 9.9
  Bottom Layer w0.2: HDR1.51@34.9,60.5 34.9,56.5 38.1,53.3 U1.A11@38.1,51.9
RAM1_DATA6: HDR1.47 U1.C15 | length 12.6
  Bottom Layer w0.2: HDR1.47@33.3,60.5 33.3,58.8 34,58.1 34,55.7 35.6,54.1 35.6,51.4 34.8,51.4 34.6,51.2 34.6,50.4 U1.C15@34.1,49.9
RAM1_DATA7: HDR1.43 U1.C18 | length 10.8
  Bottom Layer w0.2: U1.C18@31.1,49.9 31.6,50.4 31.6,58.7 31.7,58.8 HDR1.43@31.7,60.5
RAM1_OE: HDR1.39 U1.B18 | length 10
  Bottom Layer w0.2: HDR1.39@30.1,60.5 30.1,58.8 30.6,58.3 30.6,51.4 U1.B18@31.1,50.9
RAM1_WE: HDR1.61 U1.B9 | length 10.5
  Bottom Layer w0.2: HDR1.61@38.9,60.5 38.9,57.7 40.6,56 40.6,51.5 40.1,51 U1.B9@40.1,50.9
RAM_ADDR0: HDR1.21 U1.A23 | length 9.9
  Bottom Layer w0.2: HDR1.21@22.9,60.5 22.9,58.5 26.1,55.3 26.1,52.5 U1.A23@26.1,51.9
RAM_ADDR1: HDR1.25 U1.A22 | length 9.7
  Bottom Layer w0.2: HDR1.25@24.5,60.5 24.5,58.4 27.1,55.8 27.1,52.5 U1.A22@27.1,51.9
RAM_ADDR2: HDR1.29 U1.A21 | length 9.4
  Bottom Layer w0.2: HDR1.29@26.1,60.5 26.1,58.6 28.1,56.6 28.1,52.5 U1.A21@28.1,51.9
RAM_ADDR3: HDR1.33 U1.A20 | length 9.2
  Bottom Layer w0.2: HDR1.33@27.7,60.5 27.7,58.6 29.1,57.2 29.1,52.5 U1.A20@29.1,51.9
RAM_ADDR4: HDR1.65 U1.B8 | length 10.3
  Bottom Layer w0.2: HDR1.65@40.5,60.5 40.5,58.1 41.6,57 41.6,52.6 41.6,51.4 U1.B8@41.1,50.9
RAM_ADDR5: HDR1.69 U1.B7 | length 10.1
  Bottom Layer w0.2: U1.B7@42.1,51 U1.B7@42.1,50.9 42.6,51.4 42.6,57.9 42.1,58.4 HDR1.69@42.1,60.5
RAM_ADDR6: HDR1.73 U1.B6 | length 9.8
  Bottom Layer w0.2: U1.B6@43.1,50.9 43.6,51.4 43.6,58.2 43.7,58.3 HDR1.73@43.7,60.5
RAM_ADDR7: HDR1.77 U1.B5 | length 10.3
  Bottom Layer w0.2: U1.B5@44.1,50.9 44.6,51.4 44.6,52.6 44.6,54.3 45.6,55.3 45.6,57.5 45.6,58 45.3,58.3 HDR1.77@45.3,60.5
RAM_ADDR8: HDR1.75 U1.A5 | length 9.2
  Bottom Layer w0.2: U1.A5@44.1,51.9 44.1,52.6 44.1,54.7 45,55.6 45,57.9 44.5,58.3 HDR1.75@44.5,60.5
RAM_ADDR9: HDR1.71 U1.A6 | length 8.7
  Bottom Layer w0.2: HDR1.71@42.9,60.5 42.9,58.4 43.1,58.2 43.1,52.6 U1.A6@43.1,51.9
RAM_ADDR10: HDR1.67 U1.A7 | length 8.9
  Bottom Layer w0.2: HDR1.67@41.3,60.5 41.3,58.2 42.1,57.4 U1.A7@42.1,51.9
RAM_ADDR11: HDR1.63 U1.A8 | length 9.2
  Bottom Layer w0.2: HDR1.63@39.7,60.5 39.7,57.7 41.1,56.3 41.1,52.6 U1.A8@41.1,51.9
RAM_ADDR12: HDR1.59 U1.A9 | length 9.4
  Bottom Layer w0.2: HDR1.59@38.1,60.5 38.1,57.6 40.1,55.6 U1.A9@40.1,51.9
RAM_ADDR13: HDR1.35 U1.B19 | length 10.3
  Bottom Layer w0.2: HDR1.35@28.5,60.5 28.5,58.7 29.6,57.6 29.6,51.4 U1.B19@30.1,50.9
RAM_ADDR14: HDR1.31 U1.B20 | length 10.7
  Bottom Layer w0.2: HDR1.31@26.9,60.5 26.9,58.6 28.6,56.9 28.6,52.3 ; 28.6,52.5 28.6,51.4 U1.B20@29.1,50.9
RAM_ADDR15: HDR1.27 U1.B21 | length 10.8
  Bottom Layer w0.2: HDR1.27@25.3,60.5 25.3,58.5 27.6,56.2 27.6,51.5 28.1,51 U1.B21@28.1,50.9
RAM_ADDR16: HDR1.23 U1.B22 | length 11
  Bottom Layer w0.2: HDR1.23@23.7,60.5 23.7,58.5 26.6,55.6 26.6,52.5 26.6,51.4 U1.B22@27.1,50.9
RAM_CS: HDR1.37 U1.A19 | length 8.9
  Bottom Layer w0.2: HDR1.37@29.3,60.5 29.3,58.7 30.1,57.9 U1.A19@30.1,51.9
RED0: HDR1.6 U1.C25 | length 26.5
  Upper w0.2: v1(16.5,69.5) 16.5,66 17.3,65.2 17.3,58.9 22.3,53.9 22.3,49.8 22.7,49.4 v1(23.6,49.4)
  Bottom Layer w0.2: HDR1.6@16.5,67.3 v1(16.5,69.5) ; v1(23.6,49.4) U1.C25@24.1,49.9
RED1: HDR1.8 U1.C24 | length 27
  Upper w0.2: v1(17.3,70.2) 17.3,66.9 18.9,65.3 18.9,57.9 23.6,53.2 v1(23.6,50.4)
  Bottom Layer w0.2: HDR1.8@17.3,67.3 v1(17.3,70.2) ; v1(23.6,50.4) 24.6,50.4 U1.C24@25.1,49.9
REF_CLK: HDR2.4 U1.R25 | length 32.3
  Top Layer w0.2: v1(13.8,24) 19.8,24 19.9,24.1 20.9,25.1 20.9,27.6 20.904,36.804 21.2,37.1 23.1,37.1 23.6,37.6 v1(23.6,38.4)
  Bottom Layer w0.2: 13.8,23.141 13.8,23 ; v1(13.8,24) 13.8,23 ; HDR2.4@15.7,16.4 15.7,21 13.8,23 ; v1(23.6,38.4) U1.R25@24.1,37.9
SCL: HDR2.5 U1.W26 U5.14 | length 46
  Top Layer w0.2: U5.14@9.7,30.2 9.7,32.6 v1(9.8,32.9)
  Upper w0.2: v1(9.8,32.9) 10.5,32.9 11.2,32.2 ; v1(16.5,7.8) 16.5,14 11.2,19.4 11.2,32.2 ; v1(22.6,32.4) 21.9,32.4 21.6,32.2 11.2,32.2
  Bottom Layer w0.2: v1(16.5,7.8) HDR2.5@16.5,9.7 ; v1(22.6,32.4) 22.6,33.4 U1.W26@23.1,33.9
SDA: HDR2.3 U1.Y26 U5.12 | length 50.8
  Top Layer w0.2: v1(10.4,31.9) 11,31.9 11.017,30.2 U5.12@11.017,30.1
  Upper w0.2: v1(15.7,7.2) 15.7,13.6 10.4,18.9 v1(10.4,31.9) 9.3,31.9 8.9,32.5 8.9,33.1 9.5,33.7 23,33.7 23.6,33.1 v1(23.6,32.4)
  Bottom Layer w0.2: v1(15.7,7.2) HDR2.3@15.7,9.7 ; U1.Y26@23.1,32.9 v1(23.6,32.4)
SP0: HDR2.79 U1.AE4 | length 25
  Upper w0.2: v1(45.6,28.4) 45.6,19.7 46,19.3 v1(46.1,7)
  Bottom Layer w0.2: U1.AE4@45.1,27.9 v1(45.6,28.4) ; v1(46.1,7) HDR2.79@46.1,9.7
SP1: HDR2.81 U1.V6 | length 36.7
  lower w0.2: v1(42.6,34.4) 42.1,34.4 41.8,34.1 41.8,31.3 42.9,30.4 46.1,30.4 49.7,26.8 49.7,14.6 46.9,11.8 v1(46.9,7.6)
  Bottom Layer w0.2: v1(42.6,34.4) U1.V6@43.1,34.9 ; v1(46.9,7.6) HDR2.81@46.9,9.8
SP2: HDR2.83 U1.U6 | length 38.7
  Upper w0.2: v1(42.6,35.4) 42.1,35.4 41.8,35.1 41.8,31.3 42.8,30.4 46.1,30.4 49.7,26.8 49.7,14.6 47.7,12.6 v1(47.7,6.9)
  Bottom Layer w0.2: v1(42.6,35.4) U1.U6@43.1,35.9 ; v1(47.7,6.9) HDR2.83@47.7,9.7
SP3: HDR2.85 U1.W6 | length 35.5
  Upper w0.2: v1(42.6,32.4) 42.6,31.9 43.4,31.1 48.2,31.1 50.4,28.9 50.4,14.4 48.5,12.5 v1(48.5,7.6)
  Bottom Layer w0.2: v1(42.6,32.4) 42.6,33.4 U1.W6@43.1,33.9 ; v1(48.5,7.6) HDR2.85@48.5,9.8
SP4: HDR2.87 U1.Y4 | length 33.4
  lower w0.2: v1(44.6,32.4) 44.6,31.7 45.2,31.1 48.2,31.1 50.4,28.9 50.4,14.4 49.3,13.3 v1(49.3,7)
  Bottom Layer w0.2: v1(44.6,32.4) U1.Y4@45.1,32.9 ; v1(49.3,7) HDR2.87@49.3,9.7
SP5: HDR2.89 U1.AA3 | length 31.8
  Upper w0.2: v1(45.6,32.4) 45.6,31.7 48.5,31.7 50.9,29.3 50.9,14.1 50.1,13.3 v1(50.1,7.6)
  Bottom Layer w0.2: v1(45.6,32.4) U1.AA3@46.1,31.9 ; v1(50.1,7.6) HDR2.89@50.1,9.7
SP6: HDR2.91 U1.Y3 | length 31.6
  lower w0.2: v1(46.6,32.4) 46.6,31.9 46.8,31.7 48.5,31.7 50.9,29.3 v1(50.9,7)
  Bottom Layer w0.2: U1.Y3@46.1,32.9 v1(46.6,32.4) ; v1(50.9,7) HDR2.91@50.9,9.7
SP7: HDR2.92 U1.AB1 | length 16.2
  Bottom Layer w0.2: U1.AB1@48.127,30.873 49.322,30.878 50.9,29.3 50.9,16.6 HDR2.92@50.9,16.5
SP8: HDR2.90 U1.AB2 | length 16.7
  Bottom Layer w0.2: U1.AB2@47.1,30.9 47.6,30.4 48.9,30.4 50.4,28.9 50.4,18.1 50.1,17.8 HDR2.90@50.1,16.5
SP9: HDR2.88 U1.AF4 | length 15.5
  Bottom Layer w0.2: U1.AF4@45.1,26.9 45.6,27.4 49.1,27.4 49.7,26.8 49.7,18.4 49.3,18 HDR2.88@49.3,16.5
SP10: HDR2.86 U1.AG3 | length 11
  Bottom Layer w0.2: U1.AG3@46.1,25.9 46.6,25.4 46.6,24.2 49.2,21.7 49.2,18.7 48.5,18 HDR2.86@48.5,16.5
SP11: HDR2.84 U1.AH3 | length 10
  Bottom Layer w0.2: U1.AH3@46.1,24.9 46.1,23.7 48.7,21.3 48.7,19 47.7,18 HDR2.84@47.7,16.5
SP12: HDR2.82 U1.AG4 | length 10.1
  Bottom Layer w0.2: U1.AG4@45.1,25.9 45.6,25.4 45.6,20.1 ; 45.6,20.1 46.9,18.8 HDR2.82@46.9,16.5
SP13: HDR2.80 U1.AH4 | length 8.8
  Bottom Layer w0.2: U1.AH4@45.1,24.9 45.1,19.7 46.1,18.7 HDR2.80@46.1,16.5
SP14: HDR2.78 U1.AG5 | length 9.9
  Bottom Layer w0.2: U1.AG5@44.1,25.9 44.6,25.4 44.6,19.3 45.3,18.6 HDR2.78@45.3,16.5
SP15: HDR2.76 U1.AH5 | length 8.6
  Bottom Layer w0.2: U1.AH5@44.1,24.9 44.1,18.9 44.5,18.5 HDR2.76@44.5,16.5
SPI_CLK: HDR1.46 U1.C19 | length 24.3
  lower w0.2: v1(29.6,50.4) 29,50.4 28.9,50.6 28.9,61.4 32.5,65 v1(32.5,69.6)
  Bottom Layer w0.2: v1(29.6,50.4) U1.C19@30.1,49.9 ; HDR1.46@32.5,67.3 v1(32.5,69.6)
SPI_DIN: HDR1.44 U1.D19 | length 26.9
  Upper w0.2: v1(29.6,49.4) 28.9,49.4 28.3,50 28.3,61.9 31.7,65.3 v1(31.7,70.2)
  Bottom Layer w0.2: v1(29.6,49.4) U1.D19@30.1,48.9 ; HDR1.44@31.7,67.2 v1(31.7,70.2)
SPI_DOUT: HDR1.50 U1.F17 | length 27.8
  Upper w0.2: v1(31.6,47.4) 30.8,47.4 30.3,47.9 30.3,50.9 30.3,61.4 34.1,65.2 v1(34.1,69.6)
  Bottom Layer w0.2: v1(31.6,47.4) U1.F17@32.1,46.9 ; HDR1.50@34.1,67.3 v1(34.1,69.6)
SPI_MODE: HDR1.52 U1.D18 | length 27.1
  Upper w0.2: v1(31.6,49.4) 31.6,50.1 31.6,50.9 ; 31.6,50.2 31.6,50.9 ; v1(34.9,70.2) 34.9,64.9 30.9,60.9 30.9,51.5 31.6,50.9
  Bottom Layer w0.2: U1.D18@31.1,48.9 v1(31.6,49.4) ; HDR1.52@34.9,67.3 v1(34.9,70.2)
SPI_SEL: HDR1.48 U1.F19 | length 29
  lower w0.2: v1(29.6,46.4) 30.1,46.4 30.3,46.6 30.3,50.9 30.3,61.4 33.315,64.415 v1(33.3,70.1)
  Bottom Layer w0.2: v1(29.6,46.4) U1.F19@30.1,46.9 ; HDR1.48@33.3,67.3 v1(33.3,70.1)
SRAM0_A0: U1.K4 U3.5 | length 23.7
  Upper w0.2: v1(44.6,43.4) 44.6,43.8 44.9,44.1 60.6,44.1 61,43.7 v1(65.1,43.7)
  Bottom Layer w0.2: v1(44.6,43.4) U1.K4@45.1,42.9 ; v1(65.1,43.7) U3.5@66.9,43.7
SRAM0_A1: U1.K3 U3.4 | length 23
  lower w0.2: v1(45.6,43.4) 45.6,44.1 46.2,44.7 60.6,44.7 60.8,44.5 v1(64.5,44.5)
  Bottom Layer w0.2: v1(45.6,43.4) U1.K3@46.1,42.9 ; v1(64.5,44.5) U3.4@66.875,44.5
SRAM0_A2: U1.L4 U3.3 | length 27.1
  Upper w0.2: v1(43.6,43.4) 43.6,44.2 44.1,44.7 60.6,44.7 61.1,45.3 v1(65.1,45.3)
  Bottom Layer w0.2: v1(43.6,43.4) 43.6,42.6 43.8,42.4 44.6,42.4 U1.L4@45.1,41.9 ; v1(65.1,45.3) U3.3@66.8,45.3
SRAM0_A3: U1.J3 U3.2 | length 22.7
  lower w0.2: v1(46.6,45.4) 46.6,45.9 46.9,46.2 60.9,46.2 61.2,46.1 v1(64.5,46.1)
  Bottom Layer w0.2: U1.J3@46.1,43.9 46.6,44.4 v1(46.6,45.4) ; v1@64.4,46.1 v1(64.5,46.1) U3.2@66.875,46.1
SRAM0_A4: U1.H3 U3.1 | length 23.1
  lower w0.2: v1(45.6,45.4) 45.6,46.2 46.2,46.8 60.9,46.8 61,46.9 v1(65.1,46.9)
  Bottom Layer w0.2: v1(45.6,45.4) U1.H3@46.1,44.9 ; v1(65.1,46.9) U3.1@66.875,46.9
SRAM0_A5: U1.H2 U3.44 | length 9.5
  Bottom Layer w0.2: U1.H2@47.1,44.9 47.6,45.4 49.3,45.4 50.8,46.9 U3.44@55.725,46.9
SRAM0_A6: U1.H1 U3.43 | length 8.1
  Bottom Layer w0.2: U1.H1@48.1,44.9 49.6,44.9 50.8,46.1 U3.43@55.725,46.1
SRAM0_A7: U1.J2 U3.42 | length 9.2
  Bottom Layer w0.2: U1.J2@47.1,43.9 47.6,44.4 49.9,44.4 50.8,45.3 U3.42@55.725,45.3
SRAM0_A8: U1.W1 U3.28 | length 7.6
  Bottom Layer w0.2: U1.W1@48.1,33.9 54.3,33.9 54.5,34.1 U3.28@55.625,34.1
SRAM0_A9: U1.W2 U3.27 | length 8.9
  Bottom Layer w0.2: U1.W2@47.1,33.9 47.6,33.4 50.6,33.4 50.7,33.3 U3.27@55.725,33.3
SRAM0_A10: U1.Y1 U3.26 | length 7.8
  Bottom Layer w0.2: U1.Y1@48.1,32.9 50.5,32.9 50.9,32.5 55.625,32.5 U3.26@55.725,32.5
SRAM0_A11: U1.Y2 U3.25 | length 9.1
  Bottom Layer w0.2: U1.Y2@47.1,32.9 47.6,32.4 50.1,32.4 50.8,31.7 U3.25@55.725,31.7
SRAM0_A12: U1.AA1 U3.24 | length 8
  Bottom Layer w0.2: U1.AA1@48.1,31.9 49.9,31.9 50.9,30.9 U3.24@55.725,30.9
SRAM0_A13: U1.AA2 U3.23 | length 9.4
  Bottom Layer w0.2: U1.AA2@47.1,31.9 47.6,31.4 49.5,31.4 50.8,30.1 U3.23@55.725,30.1
SRAM0_A14: U1.V5 U3.22 | length 26.6
  Upper w0.2: v1(43.6,34.4) 43.6,33.5 44,33.1 59.3,33.1 61.5,30.1 v1(64.5,30.1)
  Bottom Layer w0.2: v1(43.6,34.4) U1.V5@44.1,34.9 ; v1(64.5,30.1) U3.22@66.9,30.1